# Altium PCB Atmega16-platform.PcbDoc
Units mil, origin at the board's own origin, x right, y up, seen from the top; angles counter-clockwise.
Board outline 6000 x 4000 mil, 2 copper layers (Top Layer, Bottom Layer); 68 components, 73 nets, 259 pads, 0 vias.
Unrouted connection lines stored in the file: 169.
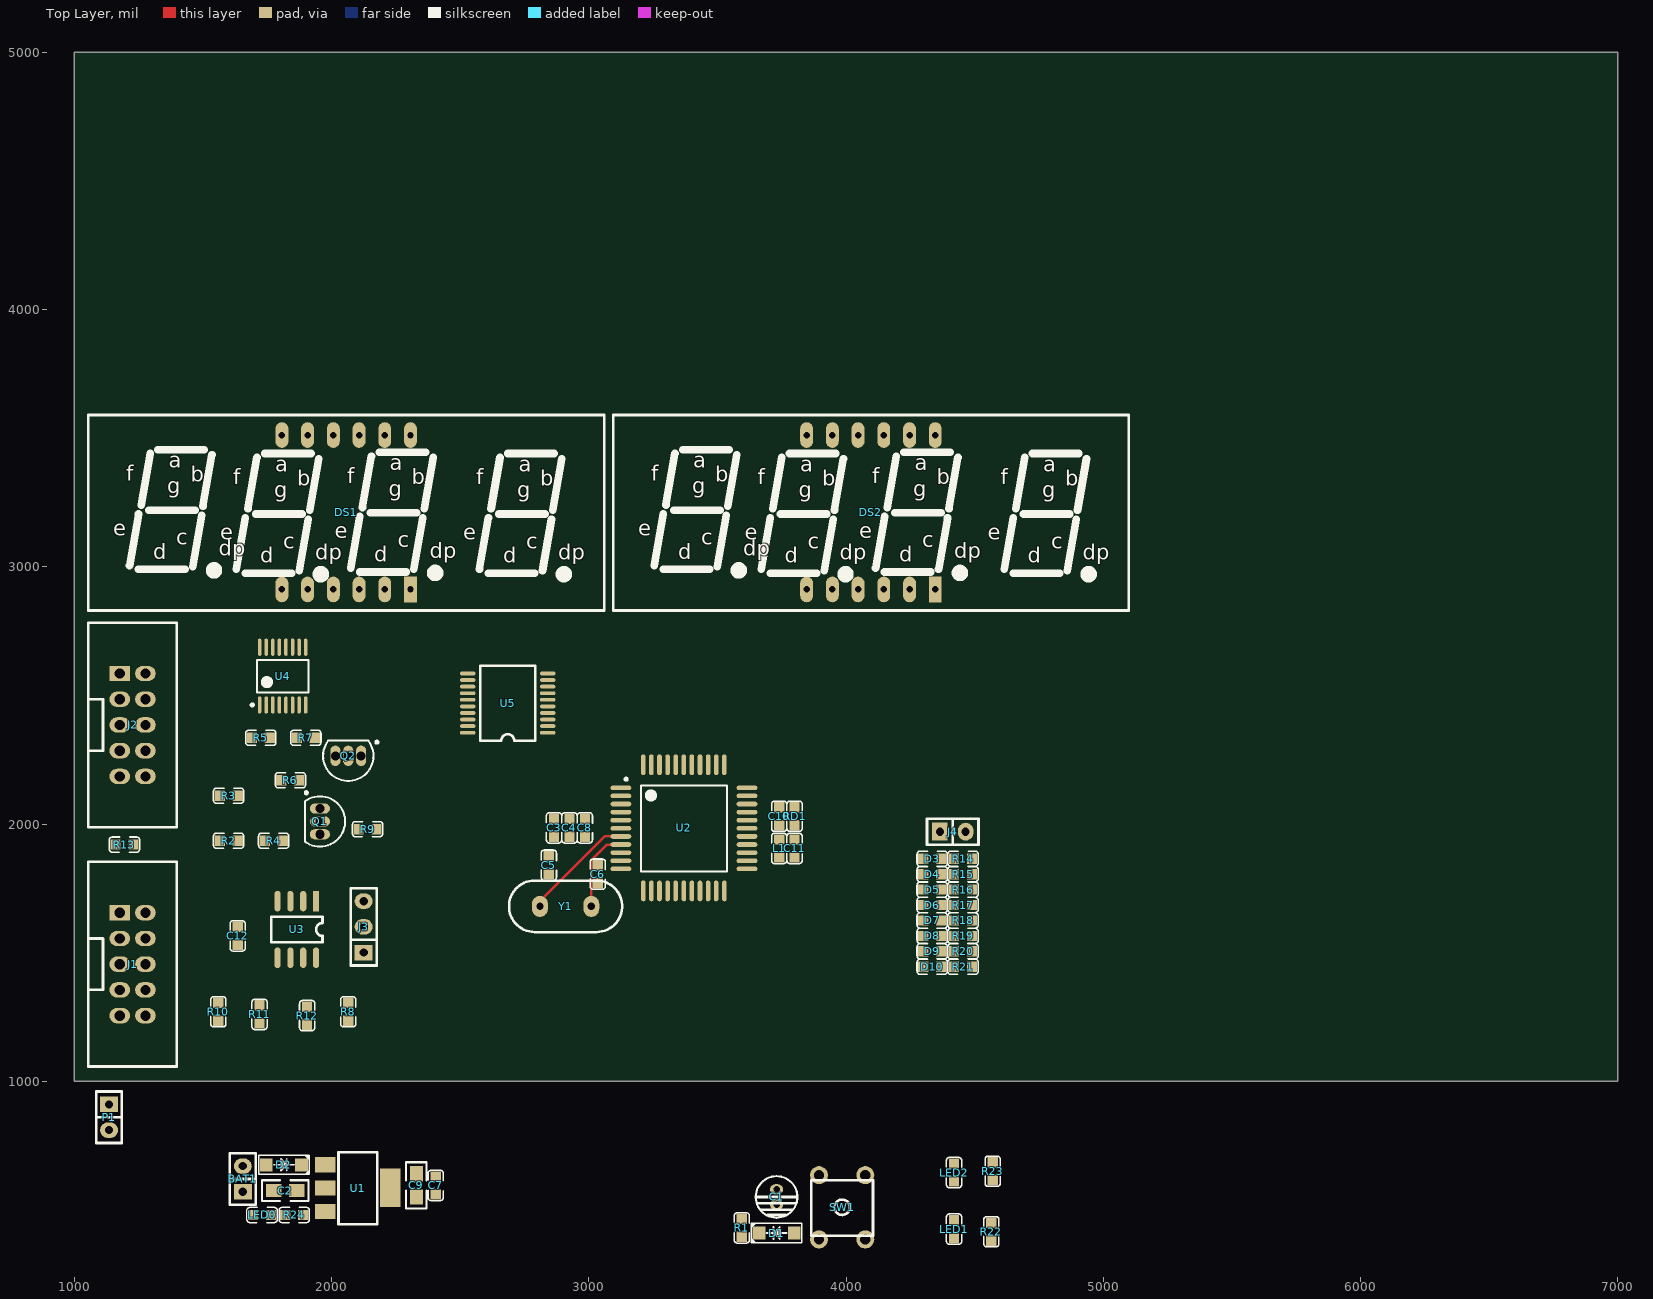
[diagram p0: Top Layer view]
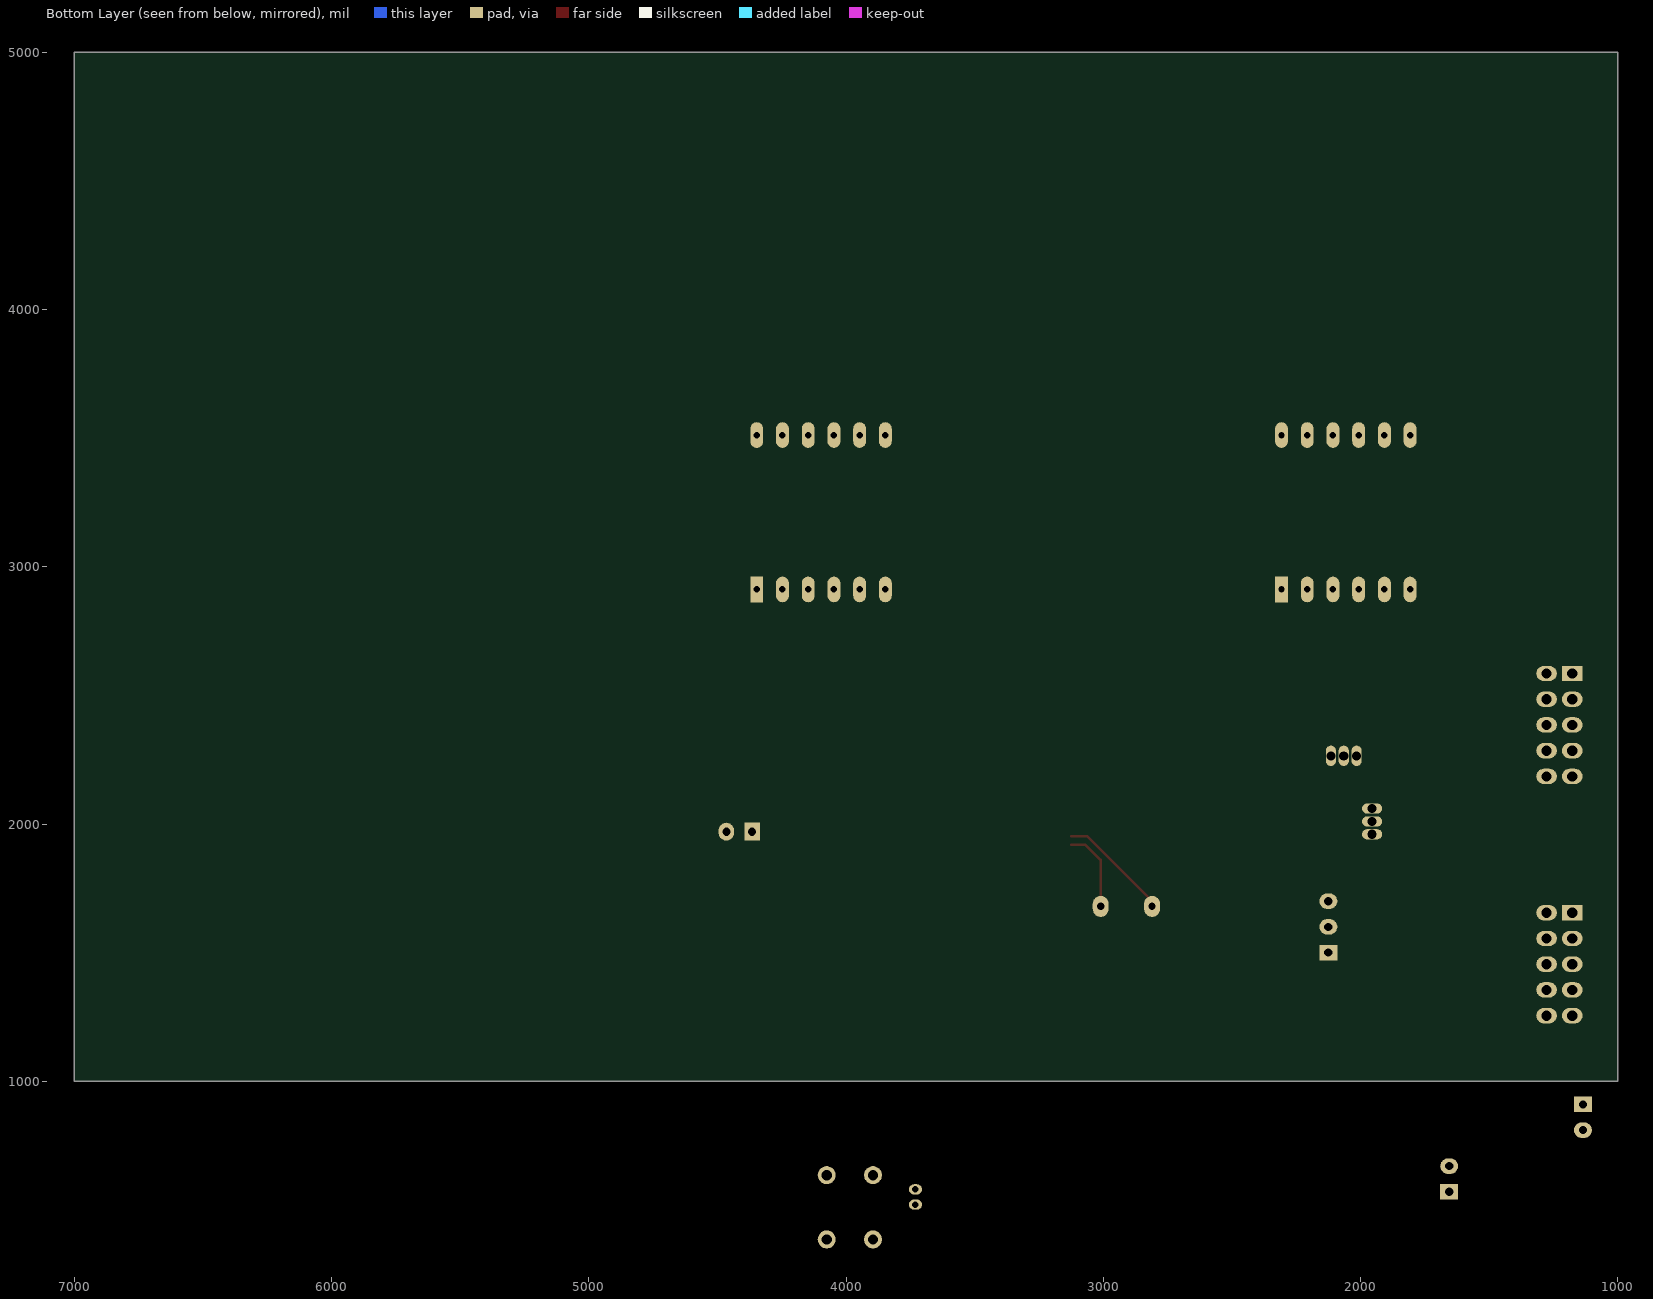
[diagram p1: Bottom Layer view, seen from below]

## Layer stack, top to bottom
Top Layer: signal copper 1.4
Dielectric: dielectric 12.6, FR-4, Dk 4.8
Bottom Layer: signal copper 1.4

## Board outline
1000,1000 7000,1000 7000,5000 1000,5000

## Design rules (kind name [scope] priority, off if disabled: settings)
Clearance [All] p1: gap=10
ComponentClearance [All] p1 off: gap=10 collisioncheckmode=3 verticalgap=10 showdistances=FALSE
PolygonConnect [All] p1: connectstyle=Relief reliefconductorwidth=10 reliefentries=4 polygonreliefangle="90 Angle" airgapwidth=10
RoutingVias [All] p1: holewidth=28 width=50 viastyle="Through Hole" minholewidth=28 minwidth=50 maxholewidth=28 maxwidth=50
SilkToSolderMaskClearance [All] p1: minsilkscreentomaskgap=10 clearancetoexposedcopper=TRUE
SolderMaskExpansion [All] p1: expansion=4
Width [All] p1: maxlimit=10 minlimit=10 preferedwidth=10
26 further rules are at their usual default settings.

## Components (designator, comment, footprint, x,y, rotation, side; value= is the part's Value field where it differs from the comment)
BAT1 "" SIP2 1655,620 r90 top
C1 "10uF/16V" 10uF/50V 3730,550 r90 top
C2 "1uF" 0805 1865,575 r180 top
C3 "104" 0603 2865,1985 r270 top
C4 "103" 0603 2925,1985 r270 top
C5 "30pF" 0603 2845,1840 r90 top
C6 "30pF" 0603 3035,1805 r90 top
C7 "100nF" 0603 2405,595 r90 top
C8 "102" 0603 2985,1985 r270 top
C9 "1uF" 0805 2330,550 r90 top
C10 "104" 0603 3740,2030 r90 top
C11 "104" 0603 3800,1905 r270 top
C12 "100nF" 0603 1635,1565 r270 top
D1 "IN4148(放电)" SOD-123 3730,410 r180 top
D2 "IN4148" SOD-123 1815,675 r0 top
D3 "LED" 0603 4335,1865 r180 top
D4 "LED" 0603 4335,1805 r180 top
D5 "LED" 0603 4335,1745 r180 top
D6 "LED" 0603 4335,1685 r180 top
D7 "LED" 0603 4335,1625 r180 top
D8 "LED" 0603 4335,1565 r180 top
D9 "LED" 0603 4335,1505 r180 top
D10 "LED" 0603 4335,1445 r180 top
DS1 "LED_8*4_SEG" 4BIT_8SEG_LED 1770,3235 r0 top
DS2 "LED_8*4_SEG" 4BIT_8SEG_LED 3810,3235 r0 top
J1 "JTAG" Jtag-10 1226.65,1455 r270 top
J2 "ISP" Jtag-10 1226.65,2385 r270 top
J3 "WP_EN" SIP3 2125,1600 r90 top
J4 "LED_ENABLE" SIP2 4415,1970 r0 top
L1 "10uH" 0603 3740,1905 r90 top
LED0 "LED" 0603 1730,480 r0 top
LED1 "LED" 0603 4420,425 r90 top
LED2 "LED" 0603 4420,645 r90 top
P1 "Serial Interface" SIP2 1135,860 r270 top
Q1 "S8550" TO-92A 1955,2010 r180 top
Q2 "S8050" TO-92A 2065,2265 r90 top
R1 "Res2" 0603 3595,430 r270 top
R2 "Res2" 0603 1600,1935 r0 top
R3 "Res2" 0603 1600,2110 r0 top
R4 "Res2" 0603 1775,1935 r0 top
R5 "Res2" 0603 1725,2335 r0 top
R6 "Res2" 0603 1840,2170 r180 top
R7 "Res2" 0603 1900,2335 r0 top
R8 "Res2" 0603 2065,1270 r90 top
R9 "Res2" 0603 2140,1980 r0 top
R10 "Res2" 0603 1560,1270 r90 top
R11 "Res2" 0603 1720,1260 r90 top
R12 "Res2" 0603 1905,1255 r90 top
R13 "Res2" 0603 1195,1920 r0 top
R14 "Res2" 0603 4455,1865 r0 top
R15 "Res2" 0603 4455,1805 r0 top
R16 "Res2" 0603 4455,1745 r0 top
R17 "Res2" 0603 4455,1685 r0 top
R18 "Res2" 0603 4455,1625 r0 top
R19 "Res2" 0603 4455,1565 r0 top
R20 "Res2" 0603 4455,1505 r0 top
R21 "Res2" 0603 4455,1445 r0 top
R22 "Res2" 0603 4565,415 r90 top
R23 "Res2" 0603 4570,650 r90 top
R24 "47K" 0603 1855,480 r0 top
RD1 "600mhz@100M" 0603 3800,2030 r90 top
SW1 "TB" AN66 3985,510 r0 top
U1 "AMS1117" SOT223 1975,675 r270 top
U2 "ATMEGA16" TQFP-44A 3370,1985 r0 top
U3 "GD25Q32" SO-8 1940,1700 r270 top
U4 "74LS138" SOT403-1_N 1810,2575 r90 top
U5 "74HC573" SOT339-1 2685,2470 r180 top
Y1 "11.0592MHZ" XTAL 2910,1680 r180 top

## Footprints (in the part's own frame and the unit in brackets; to place one, negate y for a bottom-side part, rotate by r counter-clockwise, add the part's x,y. Pads: shape width x height; smd on the part's side, far side on the other; paste and mask are expansions set on the pad)
4BIT_8SEG_LED [mil]
  oval 50x100 hole 25: a(137,277) b(537,277) c(337,-323) d(137,-323) e(37,-323) f(237,277) g(437,-323) h(237,-323) M1(37,277) M2(337,277) M3(437,277)
  rect 50x100 hole 25: M4(537,-323)
  silkscreen extent -715,-405 1290,355
10uF/50V [mil]
  oval 40x51.18 hole 25: 1(-29.53,0) 2(29.53,0)
  silkscreen extent -81,-81 81,81
0603 [mil]
  rect 40x40 smd: 1(-35,0) 2(35,0)
  silkscreen extent -59,-30 59,30
0805 [mil]
  rect 60x50 smd: 1(0,0) 2(90,0)
  silkscreen extent -45,-40 135,40
AN66 [mil]
  round 70 hole 40: 1(-90,125) 1(90,125) 2(-90,-125) 2(90,-125)
  silkscreen extent -120,-110 120,105
Jtag-10 [mil]
  rect 60x80 hole 40: 1(-200,-50)
  oval 60x80 hole 40: 2(-200,50) 3(-100,-50) 4(-100,50) 5(0,-50) 6(0,50) 7(100,-50) 8(100,50) 9(200,-50) 10(200,50)
  silkscreen extent -398,-172 398,172
SIP2 [mil]
  rect 60x70 hole 32: 1(-50,0)
  oval 60x70 hole 32: 2(50,0)
  silkscreen extent -100,-50 100,50
SIP3 [mil]
  rect 60x70 hole 32: 1(-100,0)
  oval 60x70 hole 32: 2(0,0) 3(100,0)
  silkscreen extent -150,-50 150,50
SO-8 [mil]
  rect 80x24 smd: 1(0,0)
  oval 80x24 smd: 2(0,-50) 3(0,-100) 4(0,-150) 5(220,-150) 6(220,-100) 7(220,-50) 8(220,0)
  silkscreen extent 60,-175 160,25
SOD-123 [mm]
  rect 1.27x1.27 smd: 1(-1.75,0) 2(1.75,0)
  silkscreen extent -2.5,-0.95 2.5,0.95
SOT223 [mil]
  rect 59x79 smd: 1(0,0) 2(90.55,0) 3(181.1,0)
  rect 150x79 smd: 4(89.88,253.54)
  silkscreen extent -49,52 231,202
SOT339-1 [mil]
  oval 60x15 smd: 1(-155.51,115.16) 2(-155.51,89.57) 3(-155.51,63.97) 4(-155.51,38.39) 5(-155.51,12.8) 6(-155.51,-12.8) 7(-155.51,-38.39) 8(-155.51,-63.97) 9(-155.51,-89.57) 10(-155.51,-115.16) 11(155.51,-115.16) 12(155.51,-89.57) 13(155.51,-63.98) 14(155.51,-38.39) 15(155.51,-12.8) 16(155.51,12.79) 17(155.51,38.38) 18(155.51,63.97) 19(155.51,89.56) 20(155.51,115.15)
  silkscreen extent -106,-146 106,146
SOT403-1_N [mm] "TSOP, 16-Leads, Body 5x4.4mm, Pitch 0.65mm, IPC Medium Density"
  oval 1.7x0.35 smd: 1(-2.85,2.275) 2(-2.85,1.625) 3(-2.85,0.975) 4(-2.85,0.325) 5(-2.85,-0.325) 6(-2.85,-0.975) 7(-2.85,-1.625) 8(-2.85,-2.275) 9(2.85,-2.275) 10(2.85,-1.625) 11(2.85,-0.975) 12(2.85,-0.325) 13(2.85,0.325) 14(2.85,0.975) 15(2.85,1.625) 16(2.85,2.275)
  silkscreen extent -2.97,-2.55 1.6,3.12, body extent -2.25,-2.55 2.25,2.55, height 1.1
TO-92A [mm] "TO, Flat Index; 3 In-Line, Axial Leads; Body Dia. 4.5mm; Leads 0.51 x 0.48 mm (max)"
  oval 2x1 hole 0.9: 1(0,-1.27) 2(0,0) 3(0,1.27)
  silkscreen extent -2.48,-2.95 1.5,2.48, body extent -2.5,-2.5 1.5,2.5, height 6.86
TQFP-44A [mm]
  oval 2.05x0.457 smd: 1(-6.225,3.953) 2(-6.225,3.153) 3(-6.225,2.353) 4(-6.225,1.553) 5(-6.225,0.753) 6(-6.225,-0.047) 7(-6.225,-0.847) 8(-6.225,-1.647) 9(-6.225,-2.447) 10(-6.225,-3.247) 11(-6.225,-4.047) 23(6.225,-4.047) 24(6.225,-3.247) 25(6.225,-2.447) 26(6.225,-1.647) 27(6.225,-0.847) 28(6.225,-0.047) 29(6.225,0.753) 30(6.225,1.553) 31(6.225,2.353) 32(6.225,3.153) 33(6.225,3.953)
  oval 0.457x2.05 smd: 12(-4.015,-6.227) 13(-3.215,-6.227) 14(-2.415,-6.227) 15(-1.615,-6.227) 16(-0.815,-6.227) 17(-0.015,-6.227) 18(0.785,-6.227) 19(1.585,-6.227) 20(2.385,-6.227) 21(3.185,-6.227) 22(3.985,-6.227) 34(3.985,6.227) 35(3.185,6.227) 36(2.385,6.227) 37(1.585,6.227) 38(0.785,6.227) 39(-0.015,6.227) 40(-0.815,6.227) 41(-1.615,6.227) 42(-2.415,6.227) 43(-3.215,6.227) 44(-4.015,6.227)
  silkscreen extent -5.84,-4.3 4.24,4.93, body extent -5.01,-5.05 4.99,4.95, height 1.2
XTAL [mil]
  oval 62x82 hole 28: 1(-100,0) 2(100,0)
  silkscreen extent -220,-100 220,100

## Part data
BAT1: library part "HEADER 2"
C1 C12: library part Cap, "Capacitor"
C2 C3 C4 C5 C6 C7 C8 C9: library part CAP, "Capacitor"
C10 C11: library part "Cap Semi", "Capacitor (Semiconductor SIM Model)"
D1 D2: library part DIODE, "Diode"
J3: library part CON3
J4 P1: library part "Header 2", "Header, 2-Pin"
L1: library part BEAD
Q1: library part 2N3906, "PNP General Purpose Amplifier"
Q2: library part 2N3904, "NPN General Purpose Amplifier"
R1 R2 R3 R4 R5 R6 R7 R8 R9 R10 R11 R12 R13 R14 R15 R16 R17 R18 R19 R20 R21 R22 R23: "Resistor"
R24: library part Res2, "Resistor"
RD1: library part RES
SW1: library part SW-PB
Y1: library part CRYSTAL, "Crystal"

## Nets (pads, with @x,y where several pads share a name; then routed paths per layer and width w, separated by ;. In a path a pad name is that pad's centre, name@x,y a point inside that pad or via, vN(x,y) a via of type N, cw(c..) or ccw(c..) an arc to the next point about the centre after c; other vN are vias at no path point)
1Q: DS1.a DS2.a U5.19
2Q: DS1.b DS2.b U5.18
3Q: DS1.c DS2.c U5.17
4Q: DS1.d DS2.d U5.16
5Q: DS1.e DS2.e U5.15
6Q: DS1.f DS2.f U5.14
7Q: DS1.g DS2.g U5.13
8Q: DS1.h DS2.h U5.12
AGND: C10.1 C11.1 RD1.1 U2.28
AREF: C10.2 U2.29
AVDD: C11.2 L1.2 U2.27
BAT: C2.1 C3.1 C4.1 C8.1 D1.2 D2.2 J1.4 J1.7 J2.2 J4.1 L1.1 Q1.1 R1.2 R5.2 R7.2 R13.2 R22.1 R23.1 R24.2 U1.3 U2.5 U4.16 U5.11 U5.20
GND: BAT1.1 C1.2 C2.2 C3.2 C4.2 C5.2 C6.2 C7.2 C8.2 C9.2 C12.1 J1.2 J1.10 J2.4 J2.6 J2.8 J2.10 J3.3 LED0.1 P1.2 Q2.1 R2.2 R4.2 R9.2 RD1.2 SW1.1 U1.1 U2.6 U3.4 U4.4 U4.5 U4.8 U5.1 U5.10
NetBAT1_2: BAT1.2 D2.1
NetD3_1: D3.1 R14.1
NetD4_1: D4.1 R15.1
NetD5_1: D5.1 R16.1
NetD6_1: D6.1 R17.1
NetD7_1: D7.1 R18.1
NetD8_1: D8.1 R19.1
NetD9_1: D9.1 R20.1
NetD10_1: D10.1 R21.1
NetJ3_2: J3.2 U3.3
NetJ4_2: J4.2 R14.2 R15.2 R16.2 R17.2 R18.2 R19.2 R20.2 R21.2
NetLED0_1: LED0.2 R24.1
NetLED1_1: LED1.1 R22.2
NetLED2_1: LED2.1 R23.2
NetQ1_2: Q1.2 R5.1 R6.2
NetQ1_3: Q1.3 R3.2 R4.1
NetQ2_2: Q2.2 R8.2 R9.1
NetQ2_3: Q2.3 R6.1 R7.1
NetR8_1: R8.1 U3.2
NetR10_2: R10.2 U3.1
NetR11_2: R11.2 U3.5
NetR12_2: R12.2 U3.6
PA0: U2.37 U4.1
PA1: U2.36 U4.2
PA2: U2.35 U4.3
PA3: U2.34
PA4: U2.33
PA5: U2.32
PA6: U2.31
PA7: U2.30
PB0: D3.2 U2.40 U5.2
PB1: D4.2 U2.41 U5.3
PB2: D5.2 U2.42 U5.4
PB3: D6.2 U2.43 U5.5
PB4: D7.2 R10.1 U2.44 U5.6
PB5: D8.2 J2.1 R11.1 U2.1 U5.7
PB6: D9.2 J2.9 R2.1 R3.1 U2.2 U5.8
PB7: D10.2 J2.7 R12.1 U2.3 U5.9
PC0: U2.19
PC1: U2.20
PC2: J1.1 U2.21
PC3: J1.5 U2.22
PC4: J1.3 R13.1 U2.23
PC5: J1.9 U2.24
PC7: U2.26 U4.6
PD0: LED1.2
PD1: LED2.2
RESET: C1.1 D1.1 J2.5 R1.1 SW1.2 U2.4
TX: P1.1 U2.10
V33: C7.1 C9.1 C12.2 J3.1 U1.2 U1.4 U3.7 U3.8
XTAL1: C5.1 U2.8 Y1.1 | length 319.8
  Top Layer w10: Y1.1 3010,1860 3070.16,1920.16 U2.8
XTAL2: C6.1 U2.7 Y1.2 | length 439.2
  Top Layer w10: Y1.2 2810,1700 3061.65,1951.65 U2.7
Y0: DS1.M1 U4.15
Y1: DS1.M2 U4.14
Y2: DS1.M3 U4.13
Y3: DS1.M4 U4.12
Y4: DS2.M1 U4.11
Y5: DS2.M2 U4.10
Y6: DS2.M3 U4.9
Y7: DS2.M4 U4.7
pads on no net: J1.6 J1.8 J2.3 U2.9 U2.11 U2.12 U2.13 U2.14 U2.15 U2.16 U2.17 U2.18 U2.25 U2.38 U2.39

## Text inside footprints (layer, text, board x,y; h text height)
DS1: Top Overlay "f" at 2562,3320 h60; Top Overlay "b" at 2812,3315 h60; Top Overlay "g" at 2722,3270 h60; Top Overlay "a" at 2727,3370 h60; Top Overlay "d" at 2667,3015 h60; Top Overlay "e" at 2512,3105 h60; Top Overlay "dp" at 2881,3028 h60; Top Overlay "c" at 2757,3070 h60; Top Overlay "f" at 2062,3325 h60; Top Overlay "b" at 2312,3320 h60; Top Overlay "g" at 2222,3275 h60; Top Overlay "a" at 2227,3375 h60; Top Overlay "d" at 2167,3020 h60; Top Overlay "e" at 2012,3110 h60; Top Overlay "dp" at 2381,3033 h60; Top Overlay "c" at 2257,3075 h60; Top Overlay "f" at 1202,3335 h60; Top Overlay "b" at 1452,3330 h60; Top Overlay "g" at 1362,3285 h60; Top Overlay "a" at 1367,3385 h60; Top Overlay "d" at 1307,3030 h60; Top Overlay "e" at 1152,3120 h60; Top Overlay "dp" at 1561,3043 h60; Top Overlay "c" at 1397,3085 h60; Top Overlay "f" at 1617,3320 h60; Top Overlay "b" at 1867,3315 h60; Top Overlay "g" at 1777,3270 h60; Top Overlay "a" at 1782,3370 h60; Top Overlay "d" at 1722,3015 h60; Top Overlay "e" at 1567,3105 h60; Top Overlay "dp" at 1936,3028 h60; Top Overlay "c" at 1812,3070 h60
DS2: Top Overlay "f" at 4602,3320 h60; Top Overlay "b" at 4852,3315 h60; Top Overlay "g" at 4762,3270 h60; Top Overlay "a" at 4767,3370 h60; Top Overlay "d" at 4707,3015 h60; Top Overlay "e" at 4552,3105 h60; Top Overlay "dp" at 4921,3028 h60; Top Overlay "c" at 4797,3070 h60; Top Overlay "f" at 4102,3325 h60; Top Overlay "b" at 4352,3320 h60; Top Overlay "g" at 4262,3275 h60; Top Overlay "a" at 4267,3375 h60; Top Overlay "d" at 4207,3020 h60; Top Overlay "e" at 4052,3110 h60; Top Overlay "dp" at 4421,3033 h60; Top Overlay "c" at 4297,3075 h60; Top Overlay "f" at 3242,3335 h60; Top Overlay "b" at 3492,3330 h60; Top Overlay "g" at 3402,3285 h60; Top Overlay "a" at 3407,3385 h60; Top Overlay "d" at 3347,3030 h60; Top Overlay "e" at 3192,3120 h60; Top Overlay "dp" at 3601,3043 h60; Top Overlay "c" at 3437,3085 h60; Top Overlay "f" at 3657,3320 h60; Top Overlay "b" at 3907,3315 h60; Top Overlay "g" at 3817,3270 h60; Top Overlay "a" at 3822,3370 h60; Top Overlay "d" at 3762,3015 h60; Top Overlay "e" at 3607,3105 h60; Top Overlay "dp" at 3976,3028 h60; Top Overlay "c" at 3852,3070 h60